# EAGLE board transmitter1 (EAGLE 5.10)
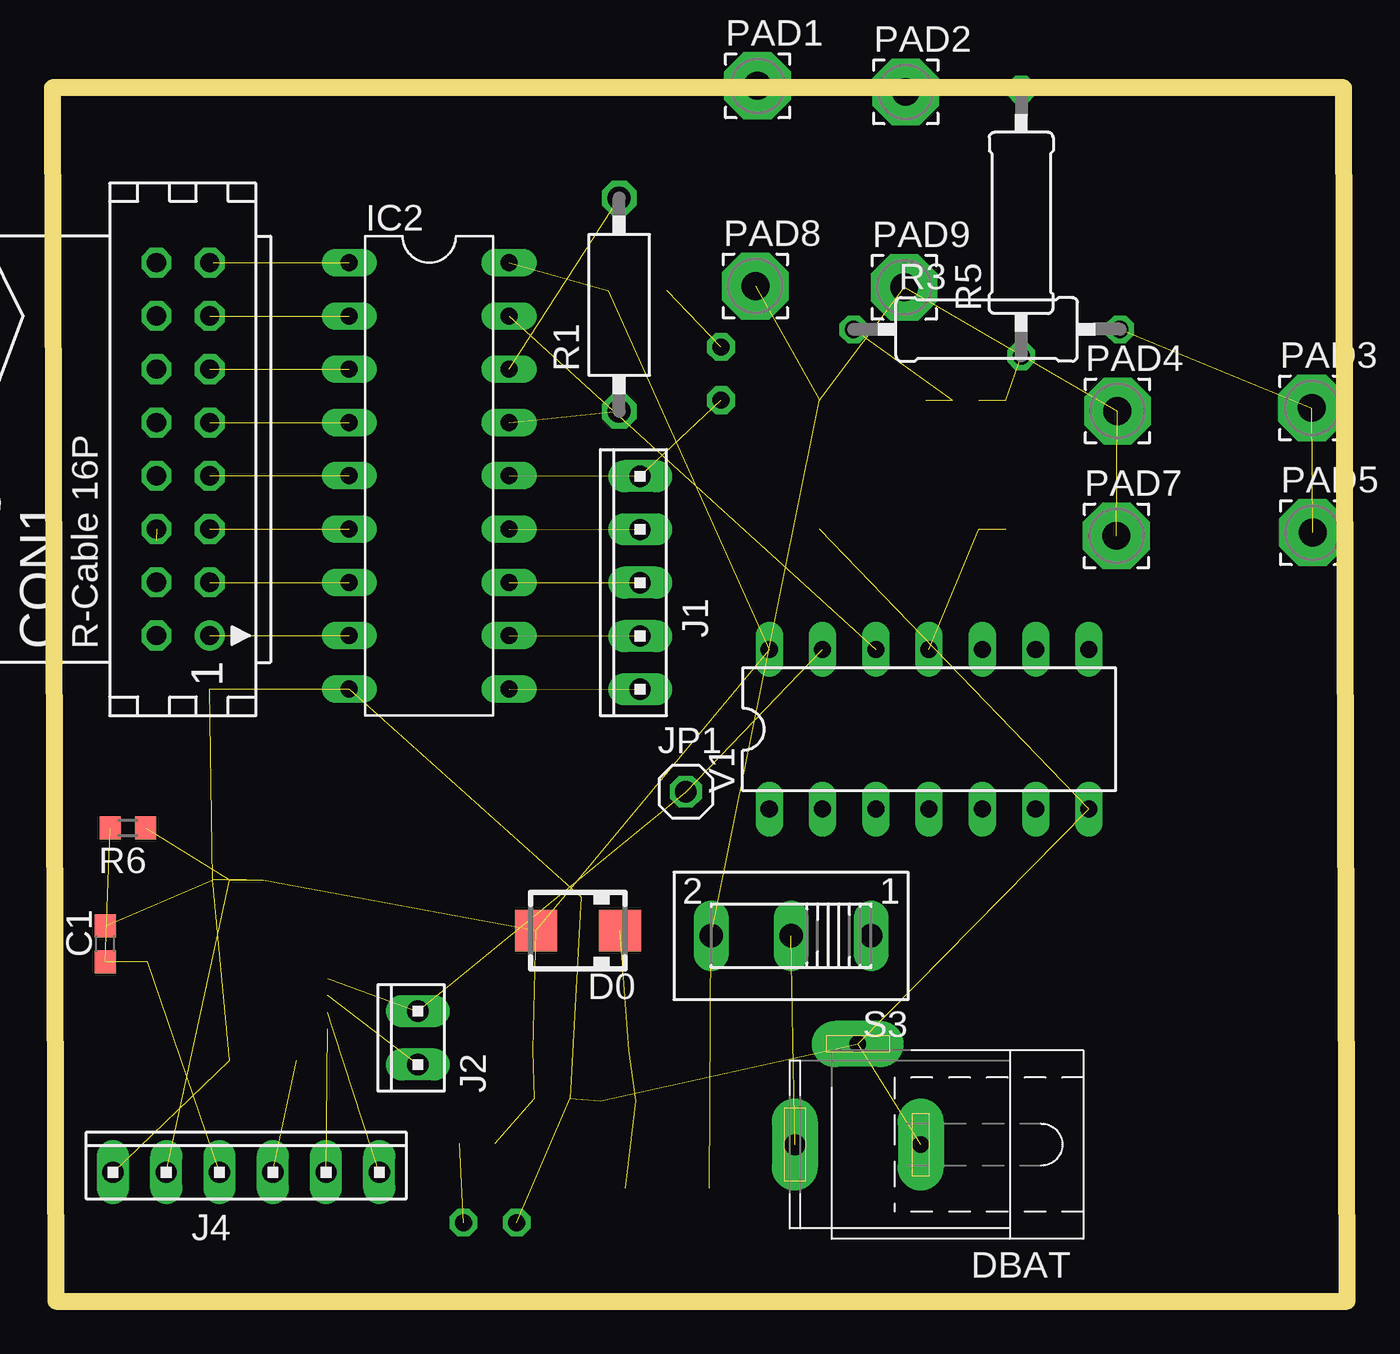
[diagram p0: board, top side]
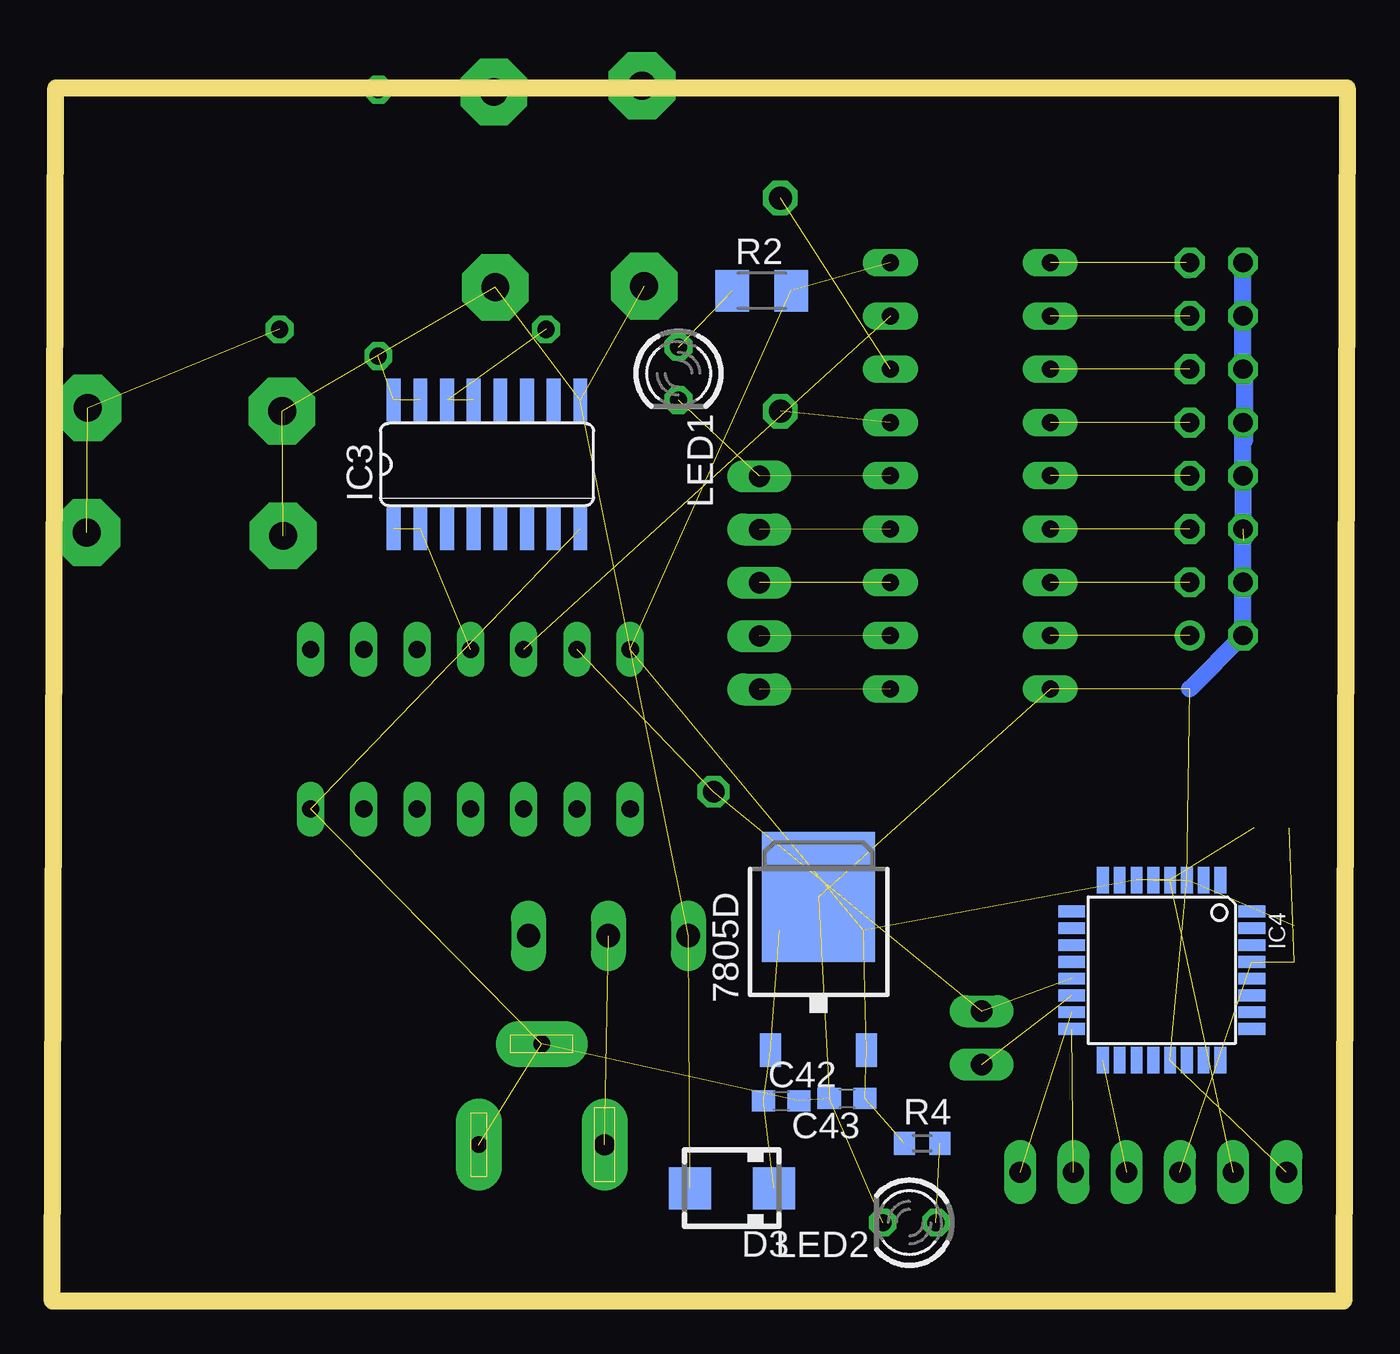
[diagram p1: board, bottom side, seen from below]

Size 61.72 x 57.85 mm. Coordinates in mm from the lower left corner, seen from the top.
Outline: 0.16,0 61.72,0 61.56,57.85 0,57.85 0.16,0
Copper layers (1*16): Top 0.035mm / dielectric 1.5mm / Bottom 0.035mm
Design rules "default": minimum track width 10mil, minimum drill 24mil, track to track 8mil, track to pad 8mil, pad to pad 8mil, via to via 8mil, smd to smd 8mil, copper to edge 40mil, drill to drill 8mil, minimum pad ring 10mil, minimum via ring 8mil, stop-mask expansion 4mil, vias tented up to drill 0mil, thermal gap 10mil

## Footprints (pad centres in the part's own frame; a part is rotated, then mirrored left to right if it is on the bottom)
TO252 = smd 1 x 1.6: 1 -2.28,-4.8; 2 2.28,-4.8 | smd 5.4 x 6.2: 3 0,2.5
C0603 = smd 1.1 x 1: 1 -0.85,0; 2 0.85,0
CON16 = drill 0.914 round: 1 -8.89,-1.27 | drill 0.914 octagon: 2 -8.89,1.27; 3 -6.35,-1.27; 4 -6.35,1.27; 5 -3.81,-1.27; 6 -3.81,1.27; 7 -1.27,-1.27; 8 -1.27,1.27; 9 1.27,-1.27; 10 1.27,1.27; 11 3.81,-1.27; 12 3.81,1.27; 13 6.35,-1.27; 14 6.35,1.27; 15 8.89,-1.27; 16 8.89,1.27
SMA = smd 2 x 2: A 2,0; C -2,0
SPC4077 = drill 0.8 pad 2.184 long: 1 -3,0; 2 0,-4.8 | drill 1 pad 2.184 long: 3 3,0
18-DIP-A = drill 0.813 long: 1 -10.16,-3.81; 2 -7.62,-3.81; 3 -5.08,-3.81; 4 -2.54,-3.81; 5 0,-3.81; 6 2.54,-3.81; 7 5.08,-3.81; 8 7.62,-3.81; 9 10.16,-3.81; 10 10.16,3.81; 11 7.62,3.81; 12 5.08,3.81; 13 2.54,3.81; 14 0,3.81; 15 -2.54,3.81; 16 -5.08,3.81; 17 -7.62,3.81; 18 -10.16,3.81
SO16 = smd 0.66 x 2.032: 1 -4.445,-3.073; 2 -3.175,-3.073; 3 -1.905,-3.073; 4 -0.635,-3.073; 5 0.635,-3.073; 6 1.905,-3.073; 7 3.175,-3.073; 8 4.445,-3.073; 9 4.445,3.073; 10 3.175,3.073; 11 1.905,3.073; 12 0.635,3.073; 13 -0.635,3.073; 14 -1.905,3.073; 15 -3.175,3.073; 16 -4.445,3.073
TQFP32-08 = smd 1.27 x 0.559: 1 -4.293,2.8; 2 -4.293,2; 3 -4.293,1.2; 4 -4.293,0.4; 5 -4.293,-0.4; 6 -4.293,-1.2; 7 -4.293,-2; 8 -4.293,-2.8; 17 4.293,-2.8; 18 4.293,-2; 19 4.293,-1.2; 20 4.293,-0.4; 21 4.293,0.4; 22 4.293,1.2; 23 4.293,2; 24 4.293,2.8 | smd 0.559 x 1.27: 9 -2.8,-4.293; 10 -2,-4.293; 11 -1.2,-4.293; 12 -0.4,-4.293; 13 0.4,-4.293; 14 1.2,-4.293; 15 2,-4.293; 16 2.8,-4.293; 25 2.8,4.293; 26 2,4.293; 27 1.2,4.293; 28 0.4,4.293; 29 -0.4,4.293; 30 -1.2,4.293; 31 -2,4.293; 32 -2.8,4.293
10X05MTA = drill 1.016 long: 1 5.08,0; 2 2.54,0; 3 0,0; 4 -2.54,0; 5 -5.08,0
10X02MTA = drill 1.016 long: 1 1.27,0; 2 -1.27,0
10X06MTA = drill 1.016 long: 1 6.35,0; 2 3.81,0; 3 1.27,0; 4 -1.27,0; 5 -3.81,0; 6 -6.35,0
1X01 = drill 1.016 octagon: 1 0,0
LED3MM = drill 0.813 octagon: A -1.27,0; K 1.27,0
3,17/1,3 = drill 1.321 pad 3.175 octagon: 1 0,0
VMTA55 = drill 1.1 octagon: 1 -5.08,0; 2 5.08,0
M1206 = smd 1.6 x 2: 1 -1.4,0; 2 1.4,0
0309/12 = drill 0.813 octagon: 1 -6.35,0; 2 6.35,0
R0603 = smd 1 x 1.1: 1 -0.85,0; 2 0.85,0
255SB = drill 1.118 long: 1 -3.81,0; 2 0,0; 3 3.81,0
DIL14 = drill 0.813 long: 1 -7.62,-3.81; 2 -5.08,-3.81; 3 -2.54,-3.81; 4 0,-3.81; 5 2.54,-3.81; 6 5.08,-3.81; 7 7.62,-3.81; 8 7.62,3.81; 9 5.08,3.81; 10 2.54,3.81; 11 0,3.81; 12 -2.54,3.81; 13 -5.08,3.81; 14 -7.62,3.81

## Placement (x,y rotation side)
7805D  7805DT  [TO252]  25.2,16.77 0 bottom
C1  [C0603]  2.52,17.04 90 top
C42  [C0603]  26.98,9.55 0 bottom
C43  [C0603]  23.84,9.66 180 bottom
CON1  [CON16]  6.23,40.62 90 top
D0  MBRA340T3  [SMA]  25.05,17.67 180 top
D3  MBRA340T3  [SMA]  29.33,5.39 180 bottom
DBAT  [SPC4077]  38.39,7.47 180 top
IC2  HT12E"  [18-DIP-A]  17.96,39.35 270 top
IC3  ULN2003AD  [SO16]  41,39.9 0 bottom
IC4  MEGA8-AI  [TQFP32-08]  8.84,15.78 270 bottom
J1  [10X05MTA]  28.01,34.25 90 top
J2  [10X02MTA]  17.42,12.55 90 top
J4  [10X06MTA]  9.24,6.15 0 top
JP1  [1X01]  30.19,24.29 0 top
LED1  [LED3MM]  31.87,44.23 270 bottom
LED2  [LED3MM]  20.86,3.75 180 bottom
PAD1  WIREPAD3,17/1,3  [3,17/1,3]  33.61,57.95 0 top
PAD2  WIREPAD3,17/1,3  [3,17/1,3]  40.68,57.65 0 top
PAD3  WIREPAD3,17/1,3  [3,17/1,3]  60.04,42.59 0 top
PAD4  WIREPAD3,17/1,3  [3,17/1,3]  50.77,42.44 0 top
PAD5  WIREPAD3,17/1,3  [3,17/1,3]  60.08,36.64 0 top
PAD7  WIREPAD3,17/1,3  [3,17/1,3]  50.72,36.49 0 top
PAD8  WIREPAD3,17/1,3  [3,17/1,3]  33.51,48.39 0 top
PAD9  WIREPAD3,17/1,3  [3,17/1,3]  40.61,48.34 0 top
R1  [VMTA55]  27.02,47.51 90 top
R2  [M1206]  27.9,48.17 0 bottom
R3  [0309/12]  44.54,46.33 0 top
R4  [R0603]  20.26,7.53 0 bottom
R5  [0309/12]  46.18,51.41 90 top
R6  [R0603]  3.6,22.56 180 top
S3  [255SB]  35.21,17.42 180 top
V1  7408N  [DIL14]  41.79,27.27 0 top

## Library data of the parts
7805D = linear
C1 C42 C43 R1-R3 R5 = rcl
CON1 = con-harting
D0 D3 = diode
DBAT = con-jack
IC2 = holtek (2)
IC3 = uln-udn
IC4 = atmel
J1 J2 J4 = con-amp
JP1 = pinhead
LED1 LED2 = led
PAD1-PAD5 PAD7-PAD9 = wirepad
R4 R6 = resistor
S3 = switch
V1 = 74ttl-din

## Nets
8V: D3.A IC3.9 PAD4.1 PAD7.1 PAD8.1 PAD9.1 S3.3
AVCC: IC4.18
GND: 7805D.3 C1.2 C42.2 C43.2 CON1.2 CON1.4 CON1.6 CON1.8 CON1.10 CON1.12 CON1.14 CON1.16 DBAT.1 DBAT.2 IC2.9 IC3.8 IC4.3 IC4.5 IC4.21 J4.6 LED2.K V1.7
N$1: CON1.15 IC2.1
N$2: CON1.13 IC2.2
N$3: CON1.11 IC2.3
N$4: CON1.9 IC2.4
N$5: CON1.7 IC2.5
N$6: DBAT.3 S3.2
N$7: IC3.15 IC3.16 R5.1
N$8: LED2.A R4.2
N$9: CON1.5 IC2.6
N$10: CON1.3 IC2.7
N$11: CON1.1 IC2.8
N$12: IC2.13 J1.2
N$13: IC2.12 J1.3
N$14: IC2.11 J1.4
N$15: IC2.10 J1.5
N$16: IC2.16 R1.2
N$17: IC2.15 R1.1
N$18: IC4.13 J2.1 JP1.1 V1.13
N$19: IC4.14 J2.2
N$20: IC3.13 IC3.14 R3.1
N$21: PAD3.1 PAD5.1 R3.2
N$22: IC2.17 V1.12
N$24: LED1.A R2.1
N$25: IC3.1 IC3.2 V1.11
N$26: IC4.15 J4.1
N$27: PAD1.1 PAD2.1 R5.2
N$28: IC4.16 J4.2
N$29: IC4.17 J4.3
RST: C1.1 IC4.29 J4.4 R6.2
TE: IC2.14 J1.1 LED1.K
VCC: 7805D.2 C43.1 D0.A IC2.18 IC4.4 IC4.6 J4.5 R2.2 R4.1 R6.1 V1.14
VI(5D): 7805D.1 C42.1 D0.C D3.C

## Tracks (layer width: path | path; a pad name or v marks a point on that pad's centre or on a via)
8V  (6 unrouted)
GND  (15 unrouted)
  Bottom 0.813: CON1.16 CON1.14 CON1.12 4.88,44.43 4.88,41.05 4.96,41.05 CON1.10 CON1.8 4.94,39.35 4.94,36.27 4.96,36.27 CON1.4 CON1.2 | CON1.2 4.9,31.73 | CON1.2 7.5,29.19
N$1  (1 unrouted)
  Bottom 0.406: 7.66,49.51 7.66,48.96 7.5,48.96 CON1.15
N$2  (1 unrouted)
N$3  (1 unrouted)
N$4  (1 unrouted)
N$5  (1 unrouted)
N$6  (1 unrouted)
N$7  (2 unrouted)
N$8  (1 unrouted)
N$9  (1 unrouted)
N$10  (1 unrouted)
N$11  (1 unrouted)
N$12  (1 unrouted)
N$13  (1 unrouted)
N$14  (1 unrouted)
N$15  (1 unrouted)
N$16  (1 unrouted)
N$17  (1 unrouted)
N$18  (3 unrouted)
N$19  (1 unrouted)
N$20  (2 unrouted)
N$21  (2 unrouted)
N$22  (1 unrouted)
N$24  (1 unrouted)
N$25  (2 unrouted)
N$26  (1 unrouted)
N$27  (2 unrouted)
N$28  (1 unrouted)
N$29  (1 unrouted)
RST  (3 unrouted)
TE  (2 unrouted)
VCC  (10 unrouted)
VI(5D)  (3 unrouted)